# EAGLE board Adafruit PCB Reference Ruler (EAGLE 6.4)
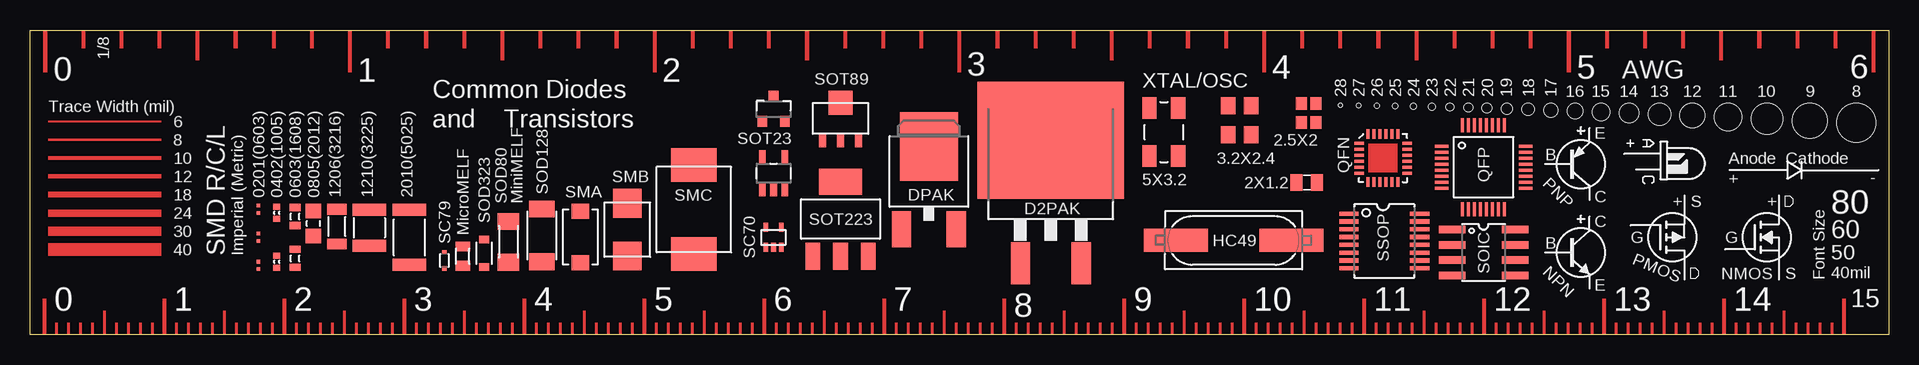
[diagram p0: board, top side]
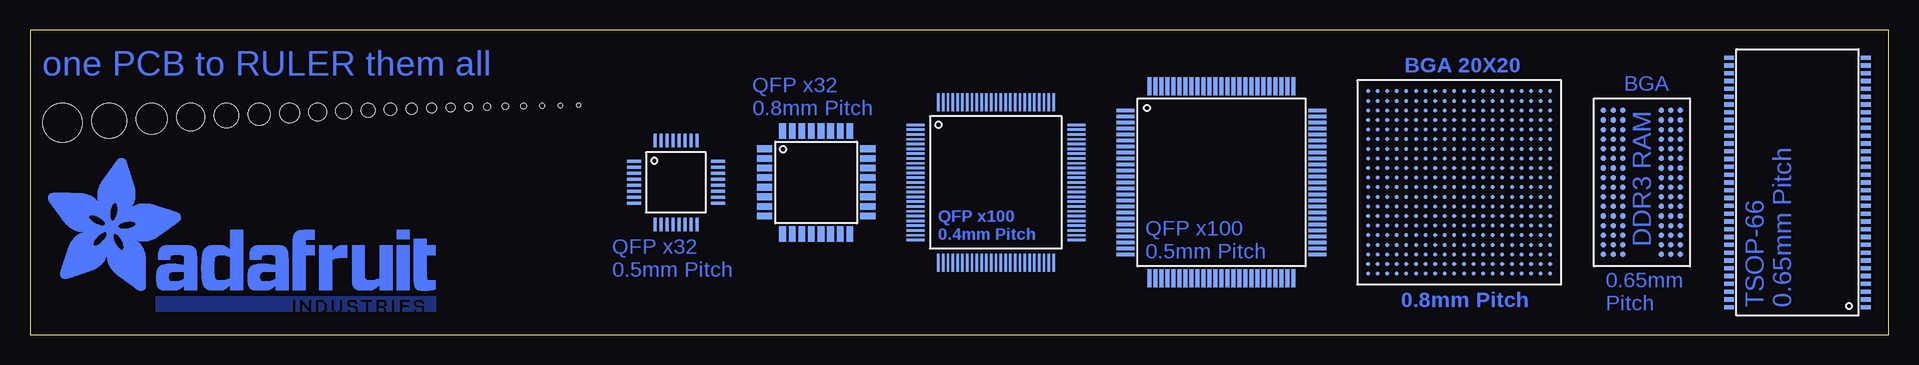
[diagram p1: board, bottom side, seen from below]

Size 154.94 x 25.4 mm. Coordinates in mm from the lower left corner, seen from the top.
Outline: 0,0 0,25.4 154.94,25.4 154.94,0 0,0
Copper layers (1*16): Top 0.035mm / dielectric 1.5mm / Bottom 0.035mm
Design rules "adafruit_rules_1": minimum track width 8mil, minimum drill 15.5mil, track to track 8mil, track to pad 8mil, pad to pad 8mil, via to via 8mil, smd to smd 8mil, copper to edge 10mil, drill to drill 8mil, minimum pad ring 10mil, minimum via ring 8mil, stop-mask expansion 4mil, vias tented up to drill 25mil, thermal gap 10mil

## Footprints (pad centres in the part's own frame; a part is rotated, then mirrored left to right if it is on the bottom)
0201 = smd 0.3 x 0.3: P$1 -0.3,0; P$2 0.3,0
0402 = smd 0.5 x 0.6: 1 -0.5,0; 2 0.5,0
0603 = smd 0.6 x 0.9: 1 -0.75,0; 2 0.75,0
0805 = smd 1.2 x 1.3: 1 -1.05,0; 2 1.05,0
1206 = smd 0.9 x 1.6: 1 -1.45,0; 2 1.45,0
1210 = smd 1 x 2.8: 1 -1.5,0; 2 1.5,0
2010 = smd 1 x 2.8: P$1 -2.3,0; P$2 2.3,0
DPAK = smd 1.6 x 3: 1 -2.28,-5.31; 3 2.28,-5.31 | smd 4.826 x 5.715: 4 0,1.588
D2PAK = smd 1.6 x 3.5: 1 -2.54,-8.275; 3 2.54,-8.275 | smd 12.2 x 9.75: TAB 0,2
SOT223 = smd 1.219 x 2.235: 1 -2.311,-3.099; 2 0,-3.099; 3 2.311,-3.099 | smd 3.6 x 2.2: 4 0,3.099
SOT89 = smd 0.58 x 1.2: 1 -1.5,-1.8; 2 0,-1.8; 3 1.5,-1.8 | smd 2 x 2: 4 0,1.3
SOT23-5 = smd 0.55 x 1.2: 1 -0.95,-1.3; 2 0,-1.3; 3 0.95,-1.3; 4 0.95,1.3; 5 -0.95,1.3
SOT23-3 = smd 0.8 x 0.9: 1 -0.95,-1; 2 0.95,-1; 3 0,1.1
SC70 = smd 0.4 x 0.75: 1 -0.65,-0.825; 2 0,-0.825; 3 0.65,-0.825; 4 0.65,0.825; 5 -0.65,0.825
CRYSTAL-SMD-5X3.2 = smd 1.8 x 1.2: 1 -2,-1.2; 2 2,-1.2; 3 2,1.2; 4 -2,1.2
CRYSTAL-SMD-3.2X2.5 = smd 1.4 x 1.2: 1 -1.2,-0.95; 2 1.2,-0.95; 3 1.2,0.95; 4 -1.2,0.95
CRYSTAL-SMD-2.5X2 = smd 1.05 x 0.9: 1 -0.795,-0.6; 2 0.795,-0.6; 3 0.795,0.6; 4 -0.795,0.6
HC49UP = smd 5.334 x 1.93: 1 -4.826,0; 2 4.826,0
XTAL-2X1.2 = smd 1 x 1.4: P$1 -0.85,0; P$2 0.85,0
MICROMELF-R = smd 0.8 x 1.2: A 0.8,0; C -0.8,0
SC79_INFINEON = smd 0.35 x 0.35: A 0.675,0; C -0.675,0
SMA-DIODE = smd 1.27 x 1.47: A -2.15,0; C 2.15,0
SMB-DIODE = smd 2.4 x 2.4: A 2.2,0; C -2.2,0
SMC = smd 2.8 x 3.8: A 3.7,0; C -3.7,0
ALL-HOLES = hole 3.26: 43.004,-1.63 | hole 2.91: 39.118,-1.455 | hole 2.59: 35.569,-1.295 | hole 2.3: 32.324,-1.15 | hole 2.05: 29.349,-1.025 | hole 1.83: 26.608,-0.915 | hole 1.63: 24.078,-0.815 | hole 1.45: 21.738,-0.725 | hole 1.29: 19.569,-0.645 | hole 1.15: 17.549,-0.575 | hole 1.02: 15.664,-0.51 | hole 0.912: 13.898,-0.456 | hole 0.812: 12.236,-0.406 | hole 0.723: 10.668,-0.361 | hole 0.644: 9.144,-0.322 | hole 0.573: 7.62,-0.286 | hole 0.511: 6.096,-0.256 | hole 0.455: 4.572,-0.228 | hole 0.405: 3.048,-0.203 | hole 0.361: 1.524,-0.18 | hole 0.321: 0,-0.161
SOD-128 = smd 1.4 x 2.1: A 2.2,0; C -2.2,0
SOD-323 = smd 0.63 x 0.83: 1 -1.15,0; 2 1.15,0
SOD80C = smd 1.4 x 1.8: A 1.7,0; C -1.7,0
QFN-24 = smd 0.8 x 0.25: 1 -2,1.25; 2 -2,0.75; 3 -2,0.25; 4 -2,-0.25; 5 -2,-0.75; 6 -2,-1.25; 13 2,-1.25; 14 2,-0.75; 15 2,-0.25; 16 2,0.25; 17 2,0.75; 18 2,1.25 | smd 0.25 x 0.8: 7 -1.25,-2; 8 -0.75,-2; 9 -0.25,-2; 10 0.25,-2; 11 0.75,-2; 12 1.25,-2; 19 1.25,2; 20 0.75,2; 21 0.25,2; 22 -0.25,2; 23 -0.75,2; 24 -1.25,2
TSSOP16 = smd 0.35 x 1.6: 1 -2.225,-2.85; 2 -1.575,-2.85; 3 -0.925,-2.85; 4 -0.275,-2.85; 5 0.375,-2.85; 6 1.025,-2.85; 7 1.675,-2.85; 8 2.325,-2.85; 9 2.325,3.05; 10 1.675,3.05; 11 1.025,3.05; 12 0.375,3.05; 13 -0.275,3.05; 14 -0.925,3.05; 15 -1.575,3.05; 16 -2.225,3.05
SO08 = smd 0.61 x 2.21: 1 -1.905,-2.616; 2 -0.635,-2.616; 3 0.635,-2.616; 4 1.905,-2.616; 5 1.905,2.616; 6 0.635,2.616; 7 -0.635,2.616; 8 -1.905,2.616
TQFP32-5MM = smd 1.143 x 0.254: 1 -3.5,1.75; 2 -3.5,1.25; 3 -3.5,0.75; 4 -3.5,0.25; 5 -3.5,-0.25; 6 -3.5,-0.75; 7 -3.5,-1.25; 8 -3.5,-1.75; 17 3.5,-1.75; 18 3.5,-1.25; 19 3.5,-0.75; 20 3.5,-0.25; 21 3.5,0.25; 22 3.5,0.75; 23 3.5,1.25; 24 3.5,1.75 | smd 0.254 x 1.143: 9 -1.75,-3.5; 10 -1.25,-3.5; 11 -0.75,-3.5; 12 -0.25,-3.5; 13 0.25,-3.5; 14 0.75,-3.5; 15 1.25,-3.5; 16 1.75,-3.5; 25 1.75,3.5; 26 1.25,3.5; 27 0.75,3.5; 28 0.25,3.5; 29 -0.25,3.5; 30 -0.75,3.5; 31 -1.25,3.5; 32 -1.75,3.5
TQFP100 = smd 1.5 x 0.3: 1 -8,6; 2 -8,5.5; 3 -8,5; 4 -8,4.5; 5 -8,4; 6 -8,3.5; 7 -8,3; 8 -8,2.5; 9 -8,2; 10 -8,1.5; 11 -8,1; 12 -8,0.5; 13 -8,0; 14 -8,-0.5; 15 -8,-1; 16 -8,-1.5; 17 -8,-2; 18 -8,-2.5; 19 -8,-3; 20 -8,-3.5; 21 -8,-4; 22 -8,-4.5; 23 -8,-5; 24 -8,-5.5; 25 -8,-6; 51 8,-6; 52 8,-5.5; 53 8,-5; 54 8,-4.5; 55 8,-4; 56 8,-3.5; 57 8,-3; 58 8,-2.5; 59 8,-2; 60 8,-1.5; 61 8,-1; 62 8,-0.5; 63 8,0; 64 8,0.5; 65 8,1; 66 8,1.5; 67 8,2; 68 8,2.5; 69 8,3; 70 8,3.5; 71 8,4; 72 8,4.5; 73 8,5; 74 8,5.5; 75 8,6 | smd 0.3 x 1.5: 26 -6,-8; 27 -5.5,-8; 28 -5,-8; 29 -4.5,-8; 30 -4,-8; 31 -3.5,-8; 32 -3,-8; 33 -2.5,-8; 34 -2,-8; 35 -1.5,-8; 36 -1,-8; 37 -0.5,-8; 38 0,-8; 39 0.5,-8; 40 1,-8; 41 1.5,-8; 42 2,-8; 43 2.5,-8; 44 3,-8; 45 3.5,-8; 46 4,-8; 47 4.5,-8; 48 5,-8; 49 5.5,-8; 50 6,-8; 76 6,8; 77 5.5,8; 78 5,8; 79 4.5,8; 80 4,8; 81 3.5,8; 82 3,8; 83 2.5,8; 84 2,8; 85 1.5,8; 86 1,8; 87 0.5,8; 88 0,8; 89 -0.5,8; 90 -1,8; 91 -1.5,8; 92 -2,8; 93 -2.5,8; 94 -3,8; 95 -3.5,8; 96 -4,8; 97 -4.5,8; 98 -5,8; 99 -5.5,8; 100 -6,8
TSOP-66 = smd 0.35 x 0.8: P$1 -10.4,-5.7; P$2 -9.75,-5.7; P$3 -9.1,-5.7; P$4 -8.45,-5.7; P$5 -7.8,-5.7; P$6 -7.15,-5.7; P$7 -6.5,-5.7; P$8 -5.85,-5.7; P$9 -5.2,-5.7; P$10 -4.55,-5.7; P$11 -3.9,-5.7; P$12 -3.25,-5.7; P$13 -2.6,-5.7; P$14 -1.95,-5.7; P$15 -1.3,-5.7; P$16 -0.65,-5.7; P$17 0,-5.7; P$18 0.65,-5.7; P$19 1.3,-5.7; P$20 1.95,-5.7; P$21 2.6,-5.7; P$22 3.25,-5.7; P$23 3.9,-5.7; P$24 4.55,-5.7; P$25 5.2,-5.7; P$26 5.85,-5.7; P$27 6.5,-5.7; P$28 7.15,-5.7; P$29 7.8,-5.7; P$30 8.45,-5.7; P$31 9.1,-5.7; P$32 9.75,-5.7; P$33 10.4,-5.7; P$34 10.4,5.7; P$35 9.75,5.7; P$36 9.1,5.7; P$37 8.45,5.7; P$38 7.8,5.7; P$39 7.15,5.7; P$40 6.5,5.7; P$41 5.85,5.7; P$42 5.2,5.7; P$43 4.55,5.7; P$44 3.9,5.7; P$45 3.25,5.7; P$46 2.6,5.7; P$47 1.95,5.7; P$48 1.3,5.7; P$49 0.65,5.7; P$50 0,5.7; P$51 -0.65,5.7; P$52 -1.3,5.7; P$53 -1.95,5.7; P$54 -2.6,5.7; P$55 -3.25,5.7; P$56 -3.9,5.7; P$57 -4.55,5.7; P$58 -5.2,5.7; P$59 -5.85,5.7; P$60 -6.5,5.7; P$61 -7.15,5.7; P$62 -7.8,5.7; P$63 -8.45,5.7; P$64 -9.1,5.7; P$65 -9.75,5.7; P$66 -10.4,5.7
BGA-0.8MM-P-19X19 = smd 0.35 x 0.35: P$1 -4.4,-4.4; P$2 -4.4,-3.6; P$3 -3.6,-3.6; P$4 -3.6,-4.4; P$5 -2.8,-4.4; P$6 -2.8,-3.6; P$7 -4.4,-2.8; P$8 -3.6,-2.8; P$9 -2.8,-2.8; P$10 -4.4,-2; P$11 -3.6,-2; P$12 -2.8,-2; P$13 -2,-2; P$14 -2,-2.8; P$15 -2,-3.6; P$16 -2,-4.4; P$17 -4.4,-1.2; P$18 -3.6,-1.2; P$19 -2.8,-1.2; P$20 -2,-1.2; P$21 -1.2,-1.2; P$22 -1.2,-2; P$23 -1.2,-2.8; P$24 -1.2,-3.6; P$25 -1.2,-4.4; P$26 -3.6,-7.6; P$27 -2.8,-7.6; P$28 -3.6,-6.8; P$29 -2.8,-6.8; P$30 -3.6,-6; P$31 -2.8,-6; P$32 -2,-6; P$33 -2,-6.8; P$34 -2,-7.6; P$35 -3.6,-5.2; P$36 -2.8,-5.2; P$37 -2,-5.2; P$38 -1.2,-5.2; P$39 -1.2,-6; P$40 -1.2,-6.8; P$41 -1.2,-7.6; P$42 -7.6,-3.6; P$43 -6.8,-3.6; P$44 -7.6,-2.8; P$45 -6.8,-2.8; P$46 -7.6,-2; P$47 -6.8,-2; P$48 -6,-2; P$49 -6,-2.8; P$50 -6,-3.6; P$51 -7.6,-1.2; P$52 -6.8,-1.2; P$53 -6,-1.2; P$54 -5.2,-1.2; P$55 -5.2,-2; P$56 -5.2,-2.8; P$57 -5.2,-3.6; P$58 -7.6,-7.6; P$59 -6.8,-7.6; P$60 -7.6,-6.8; P$61 -6.8,-6.8; P$62 -7.6,-6; P$63 -6.8,-6; P$64 -6,-6; P$65 -6,-6.8; P$66 -6,-7.6; P$67 -7.6,-5.2; P$68 -6.8,-5.2; P$69 -6,-5.2; P$70 -5.2,-5.2; P$71 -5.2,-6; P$72 -5.2,-6.8; P$73 -5.2,-7.6; P$74 -7.6,-4.4; P$75 -6.8,-4.4; P$76 -6,-4.4; P$77 -5.2,-4.4; P$78 -4.4,-5.2; P$79 -4.4,-6; P$80 -4.4,-6.8; P$81 -4.4,-7.6; P$82 2.8,-4.4; P$83 2.8,-3.6; P$84 3.6,-3.6; P$85 3.6,-4.4; P$86 4.4,-4.4; P$87 4.4,-3.6; P$88 2.8,-2.8; P$89 3.6,-2.8; P$90 4.4,-2.8; P$91 2.8,-2; P$92 3.6,-2; P$93 4.4,-2; P$94 5.2,-2; P$95 5.2,-2.8; P$96 5.2,-3.6; P$97 5.2,-4.4; P$98 2.8,-1.2; P$99 3.6,-1.2; P$100 4.4,-1.2; P$101 5.2,-1.2; P$102 6,-1.2; P$103 6,-2; P$104 6,-2.8; P$105 6,-3.6; P$106 6,-4.4; P$107 3.6,-7.6; P$108 4.4,-7.6; P$109 3.6,-6.8; P$110 4.4,-6.8; P$111 3.6,-6; P$112 4.4,-6; P$113 5.2,-6; P$114 5.2,-6.8; P$115 5.2,-7.6; P$116 3.6,-5.2; P$117 4.4,-5.2; P$118 5.2,-5.2; P$119 6,-5.2; P$120 6,-6; P$121 6,-6.8; P$122 6,-7.6; P$123 -0.4,-3.6; P$124 0.4,-3.6; P$125 -0.4,-2.8; P$126 0.4,-2.8; P$127 -0.4,-2; P$128 0.4,-2; P$129 1.2,-2; P$130 1.2,-2.8; P$131 1.2,-3.6; P$132 -0.4,-1.2; P$133 0.4,-1.2; P$134 1.2,-1.2; P$135 2,-1.2; P$136 2,-2; P$137 2,-2.8; P$138 2,-3.6; P$139 -0.4,-7.6; P$140 0.4,-7.6; P$141 -0.4,-6.8; P$142 0.4,-6.8; P$143 -0.4,-6; P$144 0.4,-6; P$145 1.2,-6; P$146 1.2,-6.8; P$147 1.2,-7.6; P$148 -0.4,-5.2; P$149 0.4,-5.2; P$150 1.2,-5.2; P$151 2,-5.2; P$152 2,-6; P$153 2,-6.8; P$154 2,-7.6; P$155 -0.4,-4.4; P$156 0.4,-4.4; P$157 1.2,-4.4; P$158 2,-4.4; P$159 2.8,-5.2; P$160 2.8,-6; P$161 2.8,-6.8; P$162 2.8,-7.6; P$163 -4.4,2.8; P$164 -4.4,3.6; P$165 -3.6,3.6; P$166 -3.6,2.8; P$167 -2.8,2.8; P$168 -2.8,3.6; P$169 -4.4,4.4; P$170 -3.6,4.4; P$171 -2.8,4.4; P$172 -4.4,5.2; P$173 -3.6,5.2; P$174 -2.8,5.2; P$175 -2,5.2; P$176 -2,4.4; P$177 -2,3.6; P$178 -2,2.8; P$179 -4.4,6; P$180 -3.6,6; P$181 -2.8,6; P$182 -2,6; P$183 -1.2,6; P$184 -1.2,5.2; P$185 -1.2,4.4; P$186 -1.2,3.6; P$187 -1.2,2.8; P$188 -3.6,-0.4; P$189 -2.8,-0.4; P$190 -3.6,0.4; P$191 -2.8,0.4; P$192 -3.6,1.2; P$193 -2.8,1.2; P$194 -2,1.2; P$195 -2,0.4; P$196 -2,-0.4; P$197 -3.6,2; P$198 -2.8,2; P$199 -2,2; P$200 -1.2,2; P$201 -1.2,1.2; P$202 -1.2,0.4; P$203 -1.2,-0.4; P$204 -7.6,3.6; P$205 -6.8,3.6; P$206 -7.6,4.4; P$207 -6.8,4.4; P$208 -7.6,5.2; P$209 -6.8,5.2; P$210 -6,5.2; P$211 -6,4.4; P$212 -6,3.6; P$213 -7.6,6; P$214 -6.8,6; P$215 -6,6; P$216 -5.2,6; P$217 -5.2,5.2; P$218 -5.2,4.4; P$219 -5.2,3.6; P$220 -7.6,-0.4; P$221 -6.8,-0.4; P$222 -7.6,0.4; P$223 -6.8,0.4; P$224 -7.6,1.2; P$225 -6.8,1.2; P$226 -6,1.2; P$227 -6,0.4; P$228 -6,-0.4; P$229 -7.6,2; P$230 -6.8,2; P$231 -6,2; P$232 -5.2,2; P$233 -5.2,1.2; P$234 -5.2,0.4; P$235 -5.2,-0.4; P$236 -7.6,2.8; P$237 -6.8,2.8; P$238 -6,2.8; P$239 -5.2,2.8; P$240 -4.4,2; P$241 -4.4,1.2; P$242 -4.4,0.4; P$243 -4.4,-0.4; P$244 2.8,2.8; P$245 2.8,3.6; P$246 3.6,3.6; P$247 3.6,2.8; P$248 4.4,2.8; P$249 4.4,3.6; P$250 2.8,4.4; P$251 3.6,4.4; P$252 4.4,4.4; P$253 2.8,5.2; P$254 3.6,5.2; P$255 4.4,5.2; P$256 5.2,5.2; P$257 5.2,4.4; P$258 5.2,3.6; P$259 5.2,2.8; P$260 2.8,6; P$261 3.6,6; P$262 4.4,6; P$263 5.2,6; P$264 6,6; P$265 6,5.2; P$266 6,4.4; P$267 6,3.6; P$268 6,2.8; P$269 3.6,-0.4; P$270 4.4,-0.4; P$271 3.6,0.4; P$272 4.4,0.4; P$273 3.6,1.2; P$274 4.4,1.2; P$275 5.2,1.2; P$276 5.2,0.4; P$277 5.2,-0.4; P$278 3.6,2; P$279 4.4,2; P$280 5.2,2; P$281 6,2; P$282 6,1.2; P$283 6,0.4; P$284 6,-0.4; P$285 -0.4,3.6; P$286 0.4,3.6; P$287 -0.4,4.4; P$288 0.4,4.4; P$289 -0.4,5.2; P$290 0.4,5.2; P$291 1.2,5.2; P$292 1.2,4.4; P$293 1.2,3.6; P$294 -0.4,6; P$295 0.4,6; P$296 1.2,6; P$297 2,6; P$298 2,5.2; P$299 2,4.4; P$300 2,3.6; P$301 -0.4,-0.4; P$302 0.4,-0.4; P$303 -0.4,0.4; P$304 0.4,0.4; P$305 -0.4,1.2; P$306 0.4,1.2; P$307 1.2,1.2; P$308 1.2,0.4; P$309 1.2,-0.4; P$310 -0.4,2; P$311 0.4,2; P$312 1.2,2; P$313 2,2; P$314 2,1.2; P$315 2,0.4; P$316 2,-0.4; P$317 -0.4,2.8; P$318 0.4,2.8; P$319 1.2,2.8; P$320 2,2.8; P$321 2.8,2; P$322 2.8,1.2; P$323 2.8,0.4; P$324 2.8,-0.4; P$325 -4.4,6.8; P$326 -3.6,6.8; P$327 -2.8,6.8; P$328 -4.4,7.6; P$329 -3.6,7.6; P$330 -2.8,7.6; P$331 -2,7.6; P$332 -2,6.8; P$338 -1.2,7.6; P$339 -1.2,6.8; P$340 -7.6,6.8; P$341 -6.8,6.8; P$342 -7.6,7.6; P$343 -6.8,7.6; P$344 -6,7.6; P$345 -6,6.8; P$350 -5.2,7.6; P$351 -5.2,6.8; P$352 2.8,6.8; P$353 3.6,6.8; P$354 4.4,6.8; P$355 2.8,7.6; P$356 3.6,7.6; P$357 4.4,7.6; P$358 5.2,7.6; P$359 5.2,6.8; P$365 6,7.6; P$366 6,6.8; P$367 -0.4,6.8; P$368 0.4,6.8; P$369 -0.4,7.6; P$370 0.4,7.6; P$371 1.2,7.6; P$372 1.2,6.8; P$377 2,7.6; P$378 2,6.8; P$379 6.8,-4.4; P$380 6.8,-3.6; P$381 6.8,-2.8; P$382 6.8,-2; P$383 7.6,-2; P$384 7.6,-2.8; P$385 7.6,-3.6; P$386 7.6,-4.4; P$387 6.8,-1.2; P$388 7.6,-1.2; P$394 6.8,-7.6; P$395 6.8,-6.8; P$396 6.8,-6; P$397 7.6,-6; P$398 7.6,-6.8; P$399 7.6,-7.6; P$400 6.8,-5.2; P$401 7.6,-5.2; P$406 6.8,2.8; P$407 6.8,3.6; P$408 6.8,4.4; P$409 6.8,5.2; P$410 7.6,5.2; P$411 7.6,4.4; P$412 7.6,3.6; P$413 7.6,2.8; P$414 6.8,6; P$415 7.6,6; P$421 6.8,-0.4; P$422 6.8,0.4; P$423 6.8,1.2; P$424 7.6,1.2; P$425 7.6,0.4; P$426 7.6,-0.4; P$427 6.8,2; P$428 7.6,2; P$433 6.8,6.8; P$434 6.8,7.6; P$435 7.6,7.6; P$436 7.6,6.8
TQFP-100-12X12MM = smd 1.5 x 0.2: 1 -6.7,4.8; 2 -6.7,4.4; 3 -6.7,4; 4 -6.7,3.6; 5 -6.7,3.2; 6 -6.7,2.8; 7 -6.7,2.4; 8 -6.7,2; 9 -6.7,1.6; 10 -6.7,1.2; 11 -6.7,0.8; 12 -6.7,0.4; 13 -6.7,0; 14 -6.7,-0.4; 15 -6.7,-0.8; 16 -6.7,-1.2; 17 -6.7,-1.6; 18 -6.7,-2; 19 -6.7,-2.4; 20 -6.7,-2.8; 21 -6.7,-3.2; 22 -6.7,-3.6; 23 -6.7,-4; 24 -6.7,-4.4; 25 -6.7,-4.8; 51 6.7,-4.8; 52 6.7,-4.4; 53 6.7,-4; 54 6.7,-3.6; 55 6.7,-3.2; 56 6.7,-2.8; 57 6.7,-2.4; 58 6.7,-2; 59 6.7,-1.6; 60 6.7,-1.2; 61 6.7,-0.8; 62 6.7,-0.4; 63 6.7,0; 64 6.7,0.4; 65 6.7,0.8; 66 6.7,1.2; 67 6.7,1.6; 68 6.7,2; 69 6.7,2.4; 70 6.7,2.8; 71 6.7,3.2; 72 6.7,3.6; 73 6.7,4; 74 6.7,4.4; 75 6.7,4.8 | smd 0.2 x 1.5: 26 -4.8,-6.7; 27 -4.4,-6.7; 28 -4,-6.7; 29 -3.6,-6.7; 30 -3.2,-6.7; 31 -2.8,-6.7; 32 -2.4,-6.7; 33 -2,-6.7; 34 -1.6,-6.7; 35 -1.2,-6.7; 36 -0.8,-6.7; 37 -0.4,-6.7; 38 0,-6.7; 39 0.4,-6.7; 40 0.8,-6.7; 41 1.2,-6.7; 42 1.6,-6.7; 43 2,-6.7; 44 2.4,-6.7; 45 2.8,-6.7; 46 3.2,-6.7; 47 3.6,-6.7; 48 4,-6.7; 49 4.4,-6.7; 50 4.8,-6.7; 76 4.8,6.7; 77 4.4,6.7; 78 4,6.7; 79 3.6,6.7; 80 3.2,6.7; 81 2.8,6.7; 82 2.4,6.7; 83 2,6.7; 84 1.6,6.7; 85 1.2,6.7; 86 0.8,6.7; 87 0.4,6.7; 88 0,6.7; 89 -0.4,6.7; 90 -0.8,6.7; 91 -1.2,6.7; 92 -1.6,6.7; 93 -2,6.7; 94 -2.4,6.7; 95 -2.8,6.7; 96 -3.2,6.7; 97 -3.6,6.7; 98 -4,6.7; 99 -4.4,6.7; 100 -4.8,6.7
TQFP32-08 = smd 1.27 x 0.559: 1 -4.293,2.8; 2 -4.293,2; 3 -4.293,1.2; 4 -4.293,0.4; 5 -4.293,-0.4; 6 -4.293,-1.2; 7 -4.293,-2; 8 -4.293,-2.8; 17 4.293,-2.8; 18 4.293,-2; 19 4.293,-1.2; 20 4.293,-0.4; 21 4.293,0.4; 22 4.293,1.2; 23 4.293,2; 24 4.293,2.8 | smd 0.559 x 1.27: 9 -2.8,-4.293; 10 -2,-4.293; 11 -1.2,-4.293; 12 -0.4,-4.293; 13 0.4,-4.293; 14 1.2,-4.293; 15 2,-4.293; 16 2.8,-4.293; 25 2.8,4.293; 26 2,4.293; 27 1.2,4.293; 28 0.4,4.293; 29 -0.4,4.293; 30 -1.2,4.293; 31 -2,4.293; 32 -2.8,4.293
BGA-96-14X8MM = smd 0.45 x 0.45: P$1 1.6,6; P$2 2.4,6; P$3 3.2,6; P$4 1.6,5.2; P$5 2.4,5.2; P$6 3.2,5.2; P$7 1.6,4.4; P$8 2.4,4.4; P$9 3.2,4.4; P$10 1.6,3.6; P$11 2.4,3.6; P$12 3.2,3.6; P$13 1.6,2.8; P$14 2.4,2.8; P$15 3.2,2.8; P$16 1.6,2; P$17 2.4,2; P$18 3.2,2; P$19 1.6,1.2; P$20 2.4,1.2; P$21 3.2,1.2; P$22 1.6,0.4; P$23 2.4,0.4; P$24 3.2,0.4; P$25 1.6,-0.4; P$26 2.4,-0.4; P$27 3.2,-0.4; P$28 1.6,-1.2; P$29 2.4,-1.2; P$30 3.2,-1.2; P$31 1.6,-2; P$32 2.4,-2; P$33 3.2,-2; P$34 1.6,-2.8; P$35 2.4,-2.8; P$36 3.2,-2.8; P$37 1.6,-3.6; P$38 2.4,-3.6; P$39 3.2,-3.6; P$40 1.6,-4.4; P$41 2.4,-4.4; P$42 3.2,-4.4; P$43 1.6,-5.2; P$44 2.4,-5.2; P$45 3.2,-5.2; P$46 1.6,-6; P$47 2.4,-6; P$48 3.2,-6; P$49 -3.2,6; P$50 -2.4,6; P$51 -1.6,6; P$52 -3.2,5.2; P$53 -2.4,5.2; P$54 -1.6,5.2; P$55 -3.2,4.4; P$56 -2.4,4.4; P$57 -1.6,4.4; P$58 -3.2,3.6; P$59 -2.4,3.6; P$60 -1.6,3.6; P$61 -3.2,2.8; P$62 -2.4,2.8; P$63 -1.6,2.8; P$64 -3.2,2; P$65 -2.4,2; P$66 -1.6,2; P$67 -3.2,1.2; P$68 -2.4,1.2; P$69 -1.6,1.2; P$70 -3.2,0.4; P$71 -2.4,0.4; P$72 -1.6,0.4; P$73 -3.2,-0.4; P$74 -2.4,-0.4; P$75 -1.6,-0.4; P$76 -3.2,-1.2; P$77 -2.4,-1.2; P$78 -1.6,-1.2; P$79 -3.2,-2; P$80 -2.4,-2; P$81 -1.6,-2; P$82 -3.2,-2.8; P$83 -2.4,-2.8; P$84 -1.6,-2.8; P$85 -3.2,-3.6; P$86 -2.4,-3.6; P$87 -1.6,-3.6; P$88 -3.2,-4.4; P$89 -2.4,-4.4; P$90 -1.6,-4.4; P$91 -3.2,-5.2; P$92 -2.4,-5.2; P$93 -1.6,-5.2; P$94 -3.2,-6; P$95 -2.4,-6; P$96 -1.6,-6

## Placement (x,y rotation side)
E$1  [EDGE-MILLIMETERS]  1.2,0 0 top
E$2  [EDGE-MILLIMETERS]  11.2,0 0 top
E$3  [EDGE-MILLIMETERS]  21.2,0 0 top
E$4  [EDGE-MILLIMETERS]  31.2,0 0 top
E$5  [EDGE-MILLIMETERS]  41.2,0 0 top
E$6  [EDGE-MILLIMETERS]  51.2,0 0 top
E$7  [EDGE-MILLIMETERS]  61.2,0 0 top
E$8  [EDGE-MILLIMETERS]  71.2,0 0 top
E$9  [EDGE-MILLIMETERS]  81.2,0 0 top
E$10  [EDGE-MILLIMETERS]  91.2,0 0 top
E$11  [EDGE-MILLIMETERS]  101.2,0 0 top
E$12  [EDGE-MILLIMETERS]  111.2,0 0 top
E$13  [EDGE-MILLIMETERS]  121.2,0 0 top
E$14  [EDGE-MILLIMETERS]  131.2,0 0 top
E$15  [EDGE-MILLIMETERS]  141.2,0 0 top
E$16  [0201]  19.05,10.46 90 top
E$17  [EDGE-INCHES-EIGTH]  1.27,25.4 0 top
E$18  [EDGE-INCHES-EIGTH]  26.67,25.4 0 top
E$19  [EDGE-INCHES-EIGTH]  52.07,25.4 0 top
E$20  [EDGE-INCHES-EIGTH]  77.47,25.4 0 top
E$21  [EDGE-INCHES-EIGTH]  102.87,25.4 0 top
E$22  [EDGE-INCHES-EIGTH]  128.27,25.4 0 top
E$23  [0402]  20.57,10.16 90 top
E$24  [0603]  22.1,9.86 90 top
E$25  [0805]  23.62,9.27 90 top
E$26  [1206]  25.58,9.02 90 top
E$27  [1210]  28.3,8.92 270 top
E$28  [2010]  31.62,8.13 90 top
E$29  [DPAK]  74.93,14.1 0 top
E$30  [D2PAK]  85.09,14.22 0 top
E$31  [SOT223]  67.56,9.65 0 top
E$32  [SOT89]  67.56,18.03 0 top
E$33  [SOT23-5]  61.98,13.46 0 top
E$34  [SOT23-3]  61.98,18.8 0 top
E$35  [SC70]  61.98,8.13 0 top
E$36  [CRYSTAL-SMD-5X3.2]  94.51,16.89 90 top
E$37  [CRYSTAL-SMD-3.2X2.5]  100.84,17.88 90 top
E$38  [CRYSTAL-SMD-2.5X2]  106.58,18.49 90 top
E$39  [HC49UP]  100.33,7.87 0 top
E$40  [XTAL-2X1.2]  106.43,12.7 0 top
E$41  [MICROMELF-R]  36.07,6.55 90 top
E$42  [SC79_INFINEON]  34.54,6.2 90 top
E$43  [SMA-DIODE]  45.87,8.15 270 top
E$44  [SMB-DIODE]  49.78,8.76 90 top
E$45  [SMC]  55.35,10.44 90 top
E$46  [ALL-HOLES]  109.22,19.3 0 top
E$47  [SOD-128]  42.67,8.28 90 top
E$48  [SOD-323]  37.85,6.81 270 top
E$49  [SOD80C]  39.88,7.75 90 top
E$50  [NMOS-SYMB]  144.78,8.13 0 top
E$51  [PMOS-SYMB]  136.91,8.13 0 top
E$52  [DIODE-SYMB]  147.07,14.22 0 top
E$53  [LED-GUIDE]  135.89,13.97 270 top
E$54  [NPN-SYMB]  129.29,6.86 0 top
E$55  [QFN-24]  112.78,14.73 0 top
E$56  [TSSOP16]  112.78,7.87 270 top
E$57  [SO08]  121.16,6.86 270 top
E$58  [TQFP32-5MM]  121.16,13.97 0 top
E$59  [PNP-SYMB]  129.29,14.22 0 top
E$60  [0201]  19.05,5.79 90 top
E$61  [0402]  20.57,6.1 90 top
E$62  [0603]  22.1,6.38 90 top
E$63  [0201]  19.05,8.13 90 top
E$65  [TQFP100]  55.63,12.7 0 bottom
E$66  [TSOP-66]  7.62,12.7 90 bottom
E$67  [BGA-0.8MM-P-19X19]  35.81,12.7 0 bottom
E$68  [TQFP-100-12X12MM]  74.42,12.7 0 bottom
E$69  [TQFP32-08]  89.41,12.7 0 bottom
E$70  [TQFP32-5MM]  101.09,12.7 0 bottom
E$71  [BGA-96-14X8MM]  20.57,12.7 0 bottom
E$72  [ADAFRUIT-LOGO-0.5IN]  153.42,2.03 0 bottom

## Library data of the parts
E$1-E$63 E$65-E$72 = Reference Ruler

## Tracks (layer width: path | path; a pad name or v marks a point on that pad's centre or on a via)
S$1
  pour Bottom (isolate 0.003, no thermals): 121.11,1.91 144.42,1.91 144.42,3.19 121.11,3.19
(copper drawn outside any net)
  shapes: Top area x8

## Text on the board
Bottom: BGA 20X20 | one PCB to RULER them all | BGA | QFP x32 / 0.8mm Pitch | QFP x100 / 0.4mm Pitch | DDR3 RAM | QFP x100 / 0.5mm Pitch | QFP x32 / 0.5mm Pitch | 0.8mm Pitch | TSOP-66 / 0.65mm Pitch | 0.65mm / Pitch
tPlace: 1/8 | 6 | 3 | 0 | 1 | 2 | SOT89 | XTAL/OSC | 4 | 5 | AWG | 28 | 27 | 26 | 25 | 24 | 23 | 22 | 21 | 20 | 19 | 18 | 17 | 16 | 15 | 14 | 13 | 12 | 11 | 10 | 9 | 8 | Trace Width (mil) | 6 | Common Diodes / and Transistors | 8 | SOT23 | 2.5X2 | 3.2X2.4 | 10 | 12 | SMB | 2X1.2 | QFN | QFP | SOD128 | SMC | 5X3.2 | 18 | 0201(0603) / 0402(1005) / 0603(1608) / 0805(2012) | 1206(3216) | 1210(3225) | 2010(5025) | SOD80 | MiniMELF | SMA | DPAK | 24 | D2PAK | 80 | SOD323 | SOT223 | 30 | SC79 | MicroMELF | 60 | 40 | SMD R/C/L | Imperial (Metric) | HC49 | SC70 | SSOP | 50 | SOIC | Font Size | 40mil | 0 | 1 | 2 | 3 | 4 | 5 | 6 | 7 | 9 | 10 | 11 | 12 | 13 | 14 | 15 | 8
bStop: BGA 20X20 | one PCB to RULER them all | BGA | QFP x32 / 0.8mm Pitch | QFP x100 / 0.4mm Pitch | DDR3 RAM | QFP x100 / 0.5mm Pitch | QFP x32 / 0.5mm Pitch | 0.8mm Pitch | TSOP-66 / 0.65mm Pitch | 0.65mm / Pitch